# Altium PCB MainPCB.PcbDoc
Units mil, origin at the board's own origin, x right, y up, seen from the top; angles counter-clockwise.
Board outline 4245 x 2995 mil, 2 copper layers (Top Layer, Bottom Layer); 53 components, 34 nets, 146 pads, 53 vias.
Unrouted connection lines stored in the file: 2.
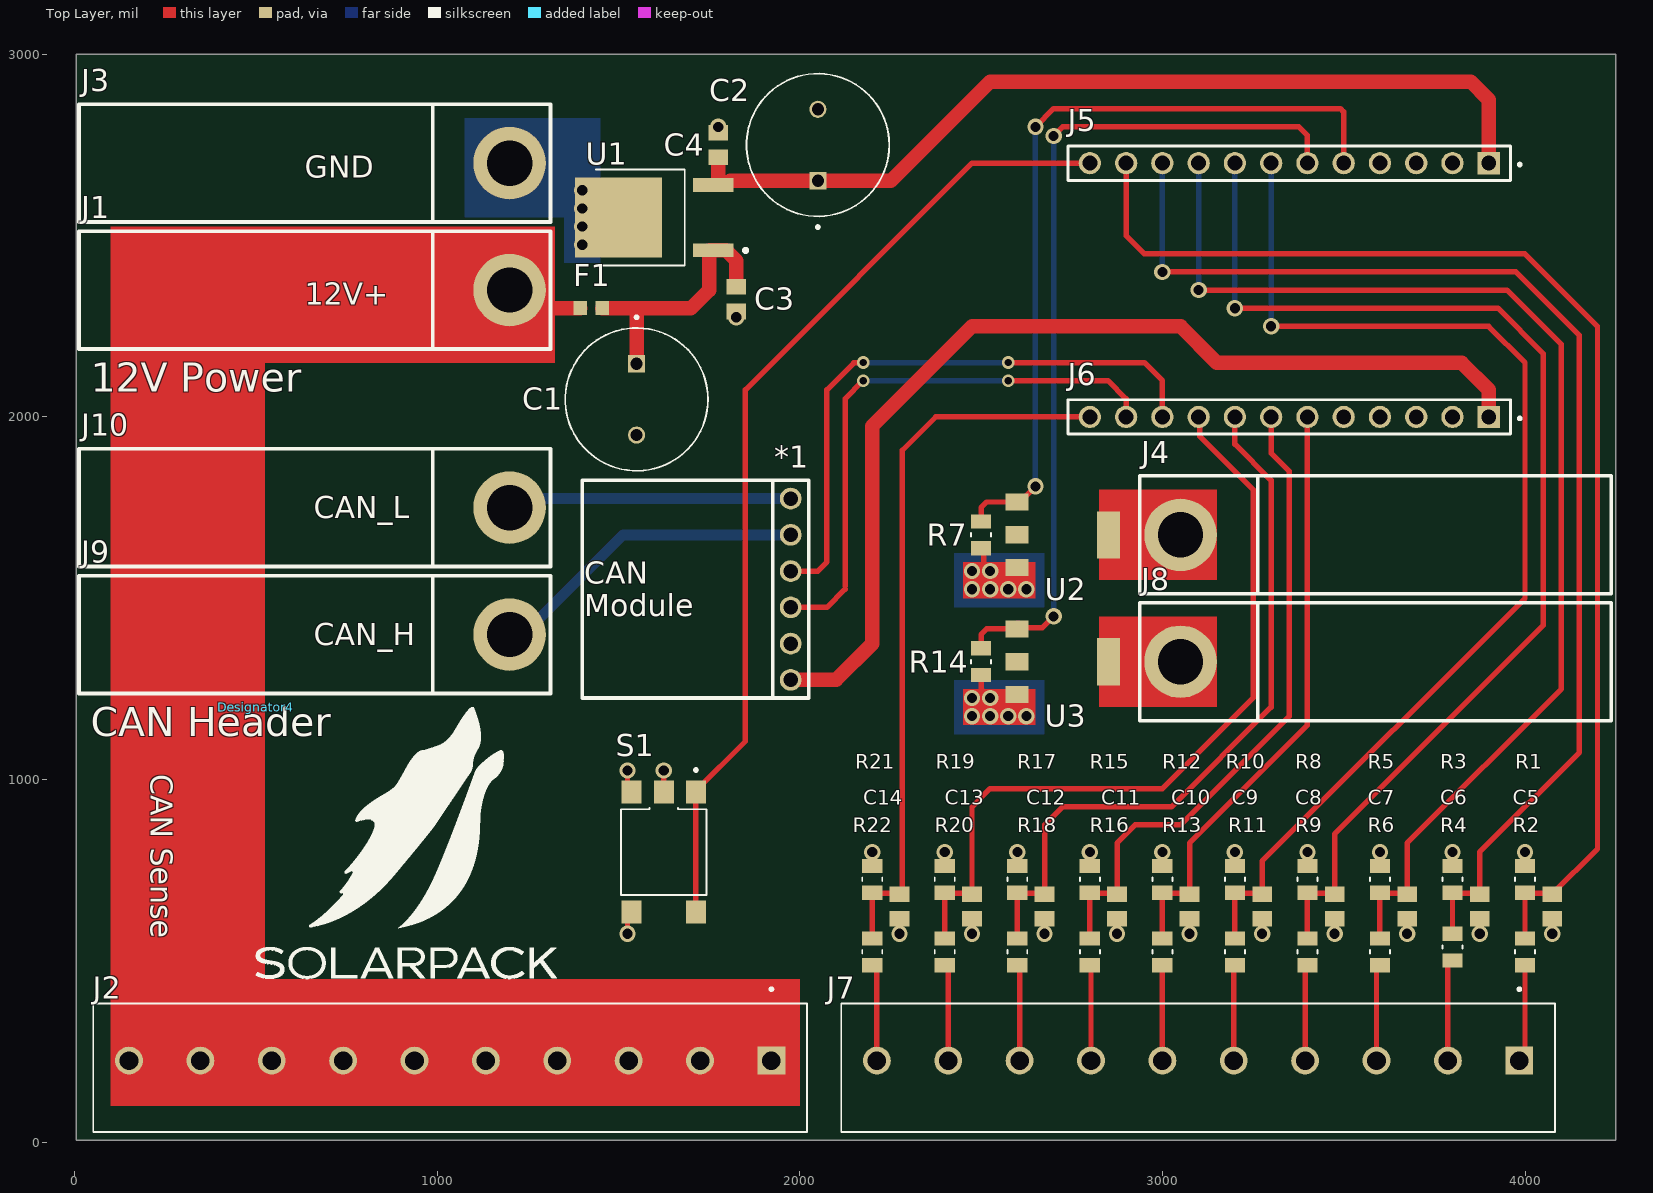
[diagram p0: Top Layer view]
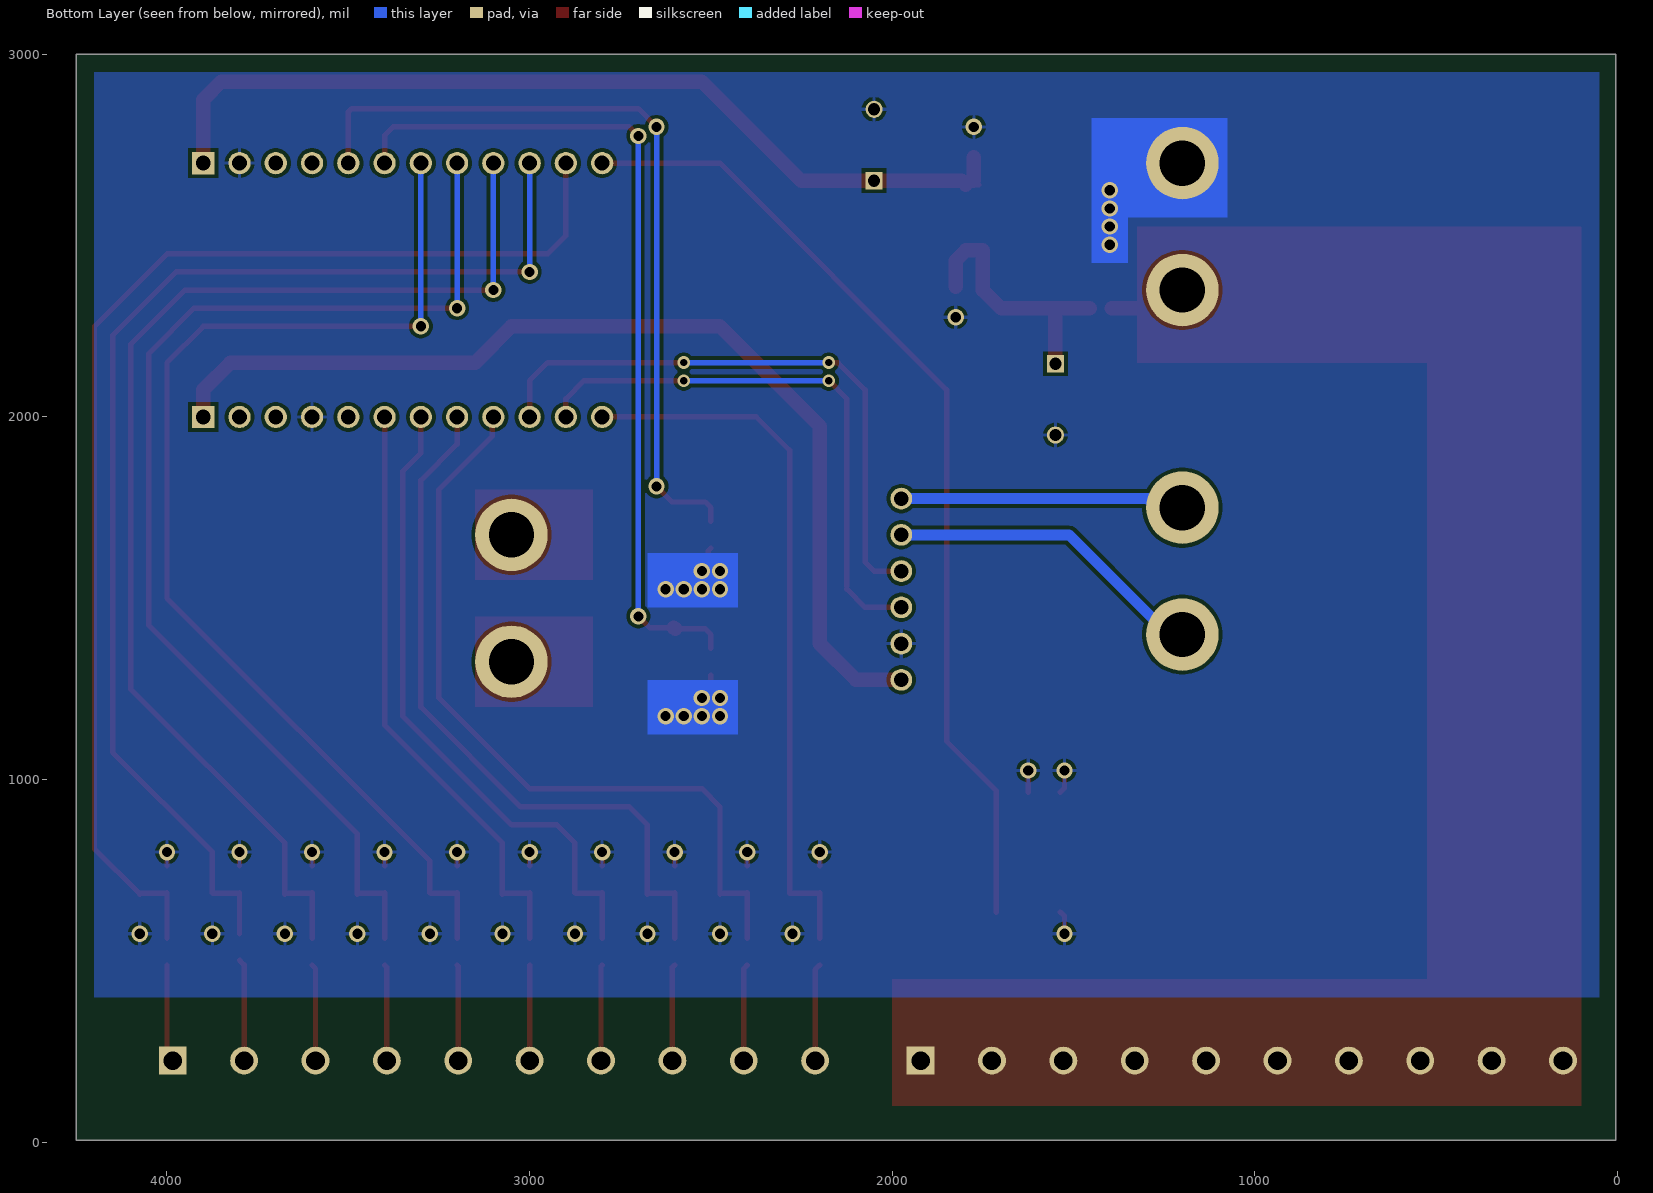
[diagram p1: Bottom Layer view, seen from below]
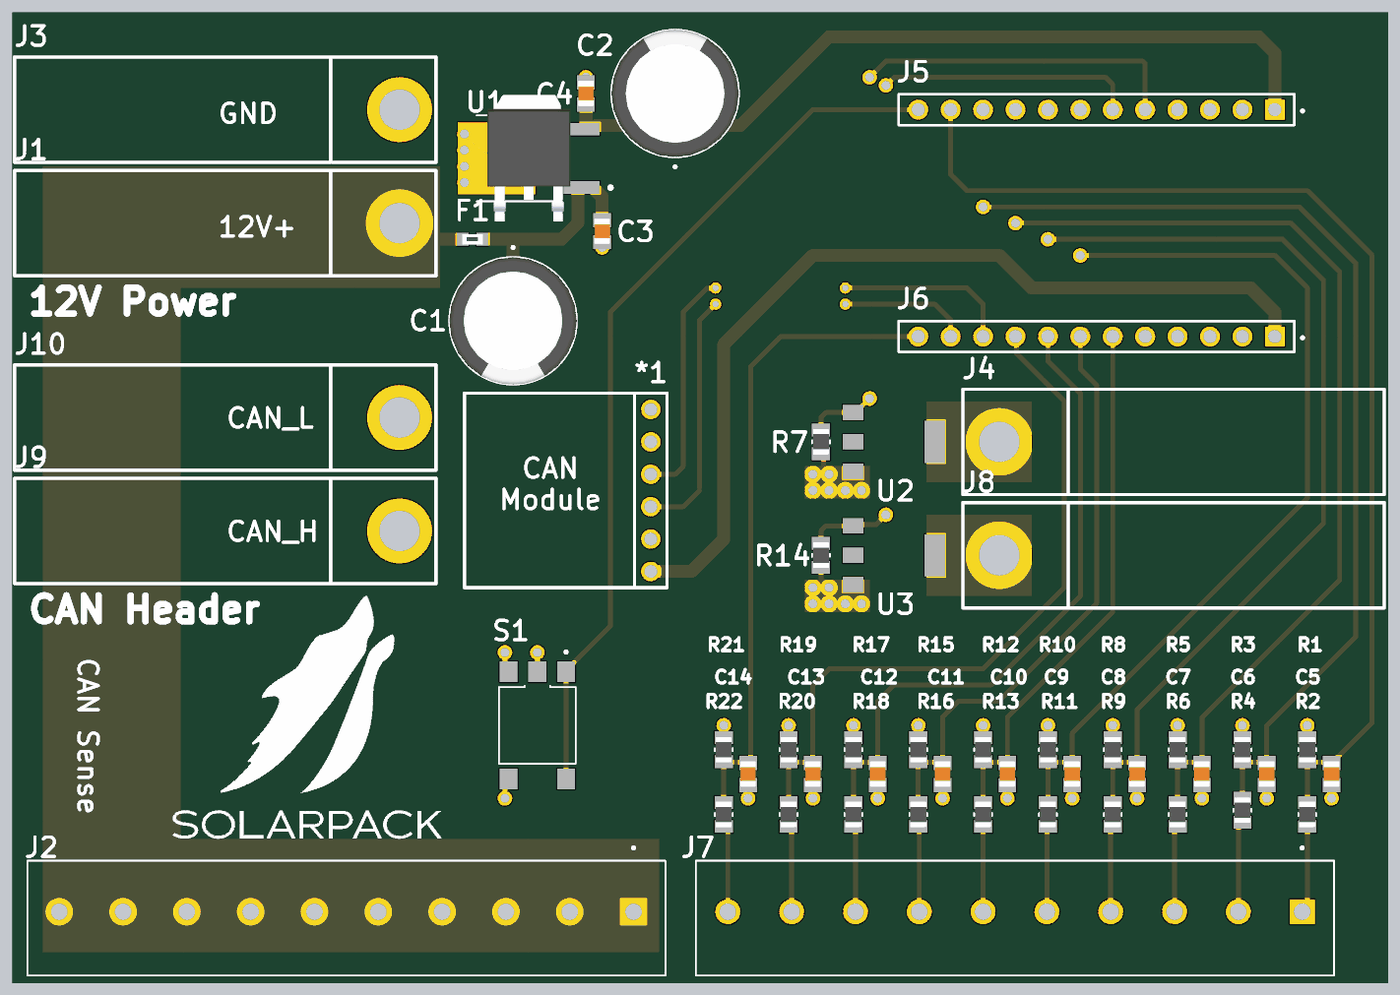
[diagram p2: 3D render of the assembled board from above, using the file's embedded part models]

## Layer stack, top to bottom
Top Solder: solder mask 0.4, Solder Resist, Dk 3.5
Top Layer: signal copper 1.4
Dielectric 1: dielectric 12.6, FR-4, Dk 4.8
Bottom Layer: signal copper 1.4
Bottom Solder: solder mask 0.4, Solder Resist, Dk 3.5

## Board outline
410,5 5,5 5,3000 4250,3000 4250,5

## Design rules (kind name [scope] priority, off if disabled: settings)
Clearance [All] p1: gap=10 ignorepadtopadclearanceinfootprint=FALSE except(0: Arc-Hole Track-Hole SMDPad-Hole THPad-Hole Via-Hole Fill-Hole Poly-Hole Region-Hole Text-Hole)
PolygonConnect [All] p1: connectstyle=Relief reliefconductorwidth=10 reliefentries=4 polygonreliefangle="90 Angle" airgapwidth=10
RoutingVias [All] p1: holewidth=28 width=30 viastyle="Through Hole" minholewidth=28 minwidth=30 maxholewidth=700 maxwidth=1000
SolderMaskExpansion [All] p1: expansion=4 istentingtop=FALSE
Width [All] p1: maxlimit=100 minlimit=10 preferedwidth=30
30 further rules are at their usual default settings.

## Components (designator, comment, footprint, x,y, rotation, side; value= is the part's Value field where it differs from the comment)
*1 "6POS_HDR" 6POS_HDR 1975,1525 r90 top
C1 "ECA1HM331B" CAPPRD500W60D1000H1600 1550,2048.43 r270 top
C2 "ECA1HM331B" CAPPRD500W60D1000H1600 2050,2750 r90 top
C3 "1uF 16V" CAPC2012X135N 1825,2325 r270 top
C4 "1uF 16V" CAPC2012X135N 1775,2750 r90 top
C5 "1uF 16V" CAPC2012X135N 4075,650 r270 top
C6 "1uF 16V" CAPC2012X135N 3875,650 r270 top
C7 "1uF 16V" CAPC2012X135N 3675,650 r270 top
C8 "1uF 16V" CAPC2012X135N 3475,650 r270 top
C9 "1uF 16V" CAPC2012X135N 3275,650 r270 top
C10 "1uF 16V" CAPC2012X135N 3075,650 r270 top
C11 "1uF 16V" CAPC2012X135N 2875,650 r270 top
C12 "1uF 16V" CAPC2012X135N 2675,650 r270 top
C13 "1uF 16V" CAPC2012X135N 2475,650 r270 top
C14 "1uF 16V" CAPC2012X135N 2275,650 r270 top
Designator4 "Comment" "Solarpack Logo" 500,1200 r0 top
F1 "C2Q-2" FUSC1608X56N 1425,2300 r0 top
J1 "AndersonEdgeMount" AndersonEdgeMount 700,2350 r0 top
J2 "TB001-500-10BE" CUI_TB001-500-10BE 1921.85,225 r180 top
J3 "AndersonEdgeMount" AndersonEdgeMount 700,2700 r0 top
J4 "AndersonEdgeMount" AndersonEdgeMount 3550,1675 r180 top
J5 "SSW-112-01-X-S" SAMTEC_SSW-112-01-X-S 3350,2700 r180 top
J6 "SSW-112-01-X-S" SAMTEC_SSW-112-01-X-S 3350,2000 r180 top
J7 "TB001-500-10BE" CUI_TB001-500-10BE 3984.25,225 r180 top
J8 "AndersonEdgeMount" AndersonEdgeMount 3550,1325 r180 top
J9 "AndersonEdgeMount" AndersonEdgeMount 700,1400 r0 top
J10 "AndersonEdgeMount" AndersonEdgeMount 700,1750 r0 top
R1 "CRG0805F13K" RESC2012X65N 4000,725 r90 top
R2 "CRG0805F30K" RESC2012X65N 4000,525 r270 top
R3 "CRG0805F13K" RESC2012X65N 3800,725 r90 top
R4 "CRG0805F30K" RESC2012X65N 3800,538.19 r270 top
R5 "CRG0805F13K" RESC2012X65N 3600,725 r90 top
R6 "CRG0805F30K" RESC2012X65N 3600,525 r270 top
R7 "CRG0805F13K" RESC2012X65N 2500,1675 r90 top
R8 "CRG0805F13K" RESC2012X65N 3400,725 r90 top
R9 "CRG0805F30K" RESC2012X65N 3400,525 r270 top
R10 "CRG0805F13K" RESC2012X65N 3200,725 r90 top
R11 "CRG0805F30K" RESC2012X65N 3200,525 r270 top
R12 "CRG0805F13K" RESC2012X65N 3000,725 r90 top
R13 "CRG0805F30K" RESC2012X65N 3000,525 r270 top
R14 "CRG0805F13K" RESC2012X65N 2500,1325 r90 top
R15 "CRG0805F13K" RESC2012X65N 2800,725 r90 top
R16 "CRG0805F30K" RESC2012X65N 2800,525 r270 top
R17 "CRG0805F13K" RESC2012X65N 2600,725 r90 top
R18 "CRG0805F30K" RESC2012X65N 2600,525 r270 top
R19 "CRG0805F13K" RESC2012X65N 2400,725 r90 top
R20 "CRG0805F30K" RESC2012X65N 2400,525 r270 top
R21 "CRG0805F13K" RESC2012X65N 2200,725 r90 top
R22 "CRG0805F30K" RESC2012X65N 2200,525 r270 top
S1 "TS06-667-43-BK-260-G-SMT-TR" SW_TS06-667-43-BK-260-G-SMT-TR 1625,800 r270 top
U1 "NCV7805BDTRKG" DPAK229P990X238-4N 1598.82,2550 r90 top
U2 "MOSFET N-CH" ZXMN6A09GTA 2725,1675 r270 top
U3 "MOSFET N-CH" ZXMN6A09GTA 2725,1325 r270 top

## Footprints (in the part's own frame and the unit in brackets; to place one, negate y for a bottom-side part, rotate by r counter-clockwise, add the part's x,y. Pads: shape width x height; smd on the part's side, far side on the other; paste and mask are expansions set on the pad)
6POS_HDR [mil] "6 Position 0.1 Pitch Header"
  round 60 hole 40: 1(-250,0) 2(-150,0) 3(-50,0) 4(50,0) 5(150,0) 6(250,0)
  silkscreen extent -300,-50 300,50
AndersonEdgeMount [mil] "An edge mounted anderson connector!"
  round 200 hole 125: 1(500,0)
  silkscreen extent -688,-162 612,162
CAPC2012X135N [mm]
  rect 1.1x1.38 smd: 1(-0.863,0) 2(0.863,0)
  body extent -1,-0.63 1,0.63, height 1.35
CAPPRD500W60D1000H1600 [mm]
  round 1.2 hole 0.85: N(2.5,0)
  rect 1.2x1.2 hole 0.85: P(-2.5,0)
  silkscreen extent -5.85,-5 5,5, body extent -5,-5 5,5, height 16
CUI_TB001-500-10BE [mm]
  rect 1.95x1.95 hole 1.3: 1(0,0)
  round 1.95 hole 1.3: 2(5,0) 3(10,0) 4(15,0) 5(20,0) 6(25,0) 7(30,0) 8(35,0) 9(40,0) 10(45,0)
  silkscreen extent -2.5,-5.1 47.5,5
DPAK229P990X238-4N [mm]
  rect 0.97x2.83 smd: 1(-2.29,-4.14) 3(2.29,-4.14)
  rect 5.63x6.09 smd paste-2.39: 2(0,2.51)
  silkscreen extent -3.37,-6.5 3.37,4.09, body extent -4.95,-3.25 4.95,3.25, height 2.39
FUSC1608X56N [mm]
  rect 0.93x0.99 smd: 1(-0.77,0) 2(0.77,0)
  body extent -0.8,-0.41 0.8,0.41, height 0.56
RESC2012X65N [mm]
  rect 1x1.42 smd: 1(-0.935,0) 2(0.935,0)
  silkscreen extent -0.12,-0.7 0.12,0.7, body extent -1,-0.63 1,0.63, height 0.65
SAMTEC_SSW-112-01-X-S [mm]
  rect 1.56x1.56 hole 1.04: 01(-13.97,0)
  round 1.56 hole 1.04: 02(-11.43,0) 03(-8.89,0) 04(-6.35,0) 05(-3.81,0) 06(-1.27,0) 07(1.27,0) 08(3.81,0) 09(6.35,0) 10(8.89,0) 11(11.43,0) 12(13.97,0)
  silkscreen extent -16.24,-1.2 15.5,1.2
"Solarpack Logo" [mil]
  silkscreen extent 0,-750 830,0
SW_TS06-667-43-BK-260-G-SMT-TR [mm]
  rect 1.6x1.4 smd: 1(-4.2,2.25) 2(-4.2,-2.25) 3(4.2,2.25) 4(4.2,-2.25) 5(-4.2,0)
  silkscreen extent -5.85,-3 3,3
ZXMN6A09GTA [mm] "N-Channel MOSFET 60V 5.4A"
  rect 1.2x1.6 smd: 1(-2.3,-3.2) 2(0,-3.2) 3(2.3,-3.2)
  rect 3.3x1.6 smd: 2(0,3.2)

## Part data
C1 C2: "M-A", Package=None, Availability=Unavailable, MF="{'manufacturer': u'Panasonic Electronic'}", MP=ECA1HM331B, Price=None
C3 C4 C5 C6 C7 C8 C9 C10 C11 C12 C13 C14: library part CL21B105KOFNNNE, "Cap Ceramic 1uF 16V X7R 10% Pad SMD 0805 125C T/R", Package=None, Availability=Unavailable, MF="{'manufacturer': u'Samsung Electro-Mechanics'}", MP=CL21B105KOFNNNE, Price=None
F1 J2 J7 S1 U1: Package=None, Availability=Unavailable, Price=None
  F1: MF="{'manufacturer': u'Bel Fuse'}", MP=C2Q-2
  J2 J7: MF="{'manufacturer': u'CUI Devices'}", MP=TB001-500-10BE
  S1: MF="{'manufacturer': u'CUI Devices'}", MP=TS06-667-43-BK-260-G-SMT-TR
  U1: MF="{'manufacturer': u'ON Semiconductor'}", MP=NCV7805BDTRKG
J1 J3 J4 J8 J9 J10: "Edge Mounted Anderson Connector"
J5 J6: "CONN RCPT 12POS 0.1 GOLD PCB", Package=None, Availability=Unavailable, MF="{'manufacturer': u'Samtec'}", MP=SSW-112-01-X-S, Price=None
R1 R3 R5 R7 R8 R10 R12 R14 R15 R17 R19 R21: "CRG0805 1% 13K", Package=None, Availability=Unavailable, MF="{'manufacturer': u'TE Connectivity'}", MP=CRG0805F13K, Price=None
R2 R4 R6 R9 R11 R13 R16 R18 R20 R22: "CRG0805 1% 30K", Package=None, Availability=Unavailable, MF="{'manufacturer': u'TE Connectivity'}", MP=CRG0805F30K, Price=None
U2 U3: library part ZXMN6A09GTA

## Via types
v1: diameter 45, hole 28, Top Layer to Bottom Layer, 49 vias
v2: diameter 35, hole 20, Top Layer to Bottom Layer, 4 vias

## Nets (pads, with @x,y where several pads share a name; then routed paths per layer and width w, separated by ;. In a path a pad name is that pad's centre, name@x,y a point inside that pad or via, vN(x,y) a via of type N, cw(c..) or ccw(c..) an arc to the next point about the centre after c; other vN are vias at no path point)
3V3: *1.1 J6.01 | length 2827.8
  Top Layer w40: *1.1 2100,1275 2200,1375 2200,1975 2475,2250 3050,2250 3150,2150 3825,2150 3900,2075 J6.01
5V0: C2.P C4.1 J5.01 U1.3 | length 2498.1
  Top Layer w15: U1.3 1763.41,2640.16 U1.3@1775,2651.75
  Top Layer w40: U1.3@1775,2651.75 C4.1 ; U1.3@1797.52,2641.06 1808.03,2651.57 2251.57,2651.57 2525,2925 3850,2925 3900,2875 J5.01
12V0: C1.P C3.1 F1.2 U1.1 | length 737.1
  Top Layer w40: F1.2 1550,2300 ; C1.P 1550,2300 ; C3.1 1825,2431.46 1796.61,2459.84 U1.1 1750.91,2459.84 1750,2458.94 1750,2350 1700,2300 1550,2300
12V0_UF: F1.1 J1.1 J2.1 J2.2 J2.3 J2.4 J2.5 J2.6 J2.7 J2.8 J2.9 J2.10 | length 438.9
  Top Layer w15: J1.1@1197.5,2350 J1.1@1200,2347.5 ; J1.1@1202.5,2352.5 J1.1 ; 1267.7,2207.3 1267.7,2244.46 1200,2312.16 J1.1@1200,2347.5 ; 1300,2300 1250,2350 J1.1 ; J1.1@1200,2347.5 J1.1
  Top Layer w40: 1267.7,2207.3 1300,2175 ; 1300,2300 F1.1
CAN_H: *1.5 J9.1 | length 888.9
  Bottom Layer w30: J9.1 1237.5,1400 1512.5,1675 *1.5
CAN_L: *1.6 J10.1 | length 818.6
  Top Layer w15: J10.1 J10.1@1233.24,1750
  Bottom Layer w15: J10.1 J10.1@1233.24,1750
  Bottom Layer w30: J10.1@1233.24,1750 1270.74,1750 1295.74,1775 *1.6
CAN_RX: *1.4 J6.10 | length 1662.1
  Top Layer w15: *1.4 2050,1575 2075,1600 2075,2075 2149.22,2149.22 2174.22,2149.22 v2(2175,2150) ; v2(2575,2150) 2950,2150 3000,2100 J6.10
  Bottom Layer w15: v2(2175,2150) v2(2575,2150)
CAN_TX: *1.3 J6.11 | length 1552.3
  Top Layer w15: *1.3 2075,1475 2125,1525 ; 2125,1534.81 2125,2050 v2(2175,2100) ; v2(2575,2100) 2850,2100 2900,2050 J6.11
  Bottom Layer w15: v2(2175,2100) v2(2575,2100)
GND: *1.2 C1.N C2.N C3.2 C4.2 C5.2 C6.2 C7.2 C8.2 C9.2 C10.2 C11.2 C12.2 C13.2 C14.2 J3.1 J5.02 J6.04 R1.2 R3.2 R5.2 R7.1 R8.2 R10.2 R12.2 R14.1 R15.2 R17.2 R19.2 R21.2 S1.2 S1.4 S1.5 U1.2 U2.3 U3.3 | length 880.2
  Top Layer w15: v1(1525,575) 1525,623.23 S1.4 ; v1(1525,1025) 1525,976.77 S1.2 ; S1.5 v1(1625,1025) ; R21.2 v1(2200,800) ; R19.2 v1(2400,800) ; R14.1 2500,1250 2515.55,1234.45 U3.3 ; R7.1 2507.5,1630.69 2507.5,1592.5 2534.6,1565.4 2572.1,1565.4 2572.1,1552.9 2575,1550 v1(2575,1525) ; R17.2 v1(2600,800) ; R15.2 v1(2800,800) ; R12.2 v1(3000,800) ; R10.2 v1(3200,800) ; R8.2 v1(3400,800) ; R5.2 v1(3600,800) ; R3.2 v1(3800,800) ; R1.2 v1(4000,800)
  other v1: 2275,575 2475,575 2675,575 2875,575 3075,575 3275,575 3475,575 3675,575 3875,575 4075,575 2475,1175 2525,1175 2575,1175 2625,1175 2475,1225 2525,1225 2475,1525 2525,1525 2625,1525 2475,1575 2525,1575 1825,2275 1400,2475 1400,2525 1400,2575 1400,2625 1775,2800
NetC10_1: C10.1 J6.06 R12.1 R13.1 | length 1653.8
  Top Layer w15: R13.1 R12.1 3002.11,686.08 3072.89,686.08 C10.1 3075,825 3400,1150 J6.06
NetC11_1: C11.1 J6.07 R15.1 R16.1 | length 1805.6
  Top Layer w15: R16.1 R15.1 2802.11,686.08 2872.89,686.08 2875,688.19 2875,825 2925,875 3050,875 3350,1175 3350,1850 3300,1900 J6.07
NetC12_1: C12.1 J6.08 R17.1 R18.1 | length 1995.2
  Top Layer w15: R18.1 R17.1 2602.11,686.08 2672.89,686.08 C12.1 2675,875 2725,925 3025,925 3300,1200 3300,1825 3200,1925 J6.08
NetC13_1: C13.1 J6.09 R19.1 R20.1 | length 2180.5
  Top Layer w15: R20.1 R19.1 2402.11,686.08 2472.89,686.08 C13.1 2475,925 2525,975 3000,975 3250,1225 3250,1800 3103.21,1946.79 3103.21,1996.79 J6.09
NetC14_1: C14.1 J6.12 R21.1 R22.1 | length 1984.9
  Top Layer w15: R22.1 R21.1@2200,686.08 ; R21.1 2202.11,686.08 2282.62,686.08 2282.62,1907.62 2375,2000 J6.12
NetJ4_1: J4.1 U2.2
NetJ5_05: J5.05 R7.2 U2.1 | length 2219.4
  Top Layer w15: R7.2 2500,1750 2515.55,1765.55 U2.1 2606.89,1765.55 v1(2650,1808.66) ; v1(2650,2800) 2700,2850 3491.21,2850 3500,2841.21 J5.05
  Bottom Layer w15: v1(2650,1808.66) v1(2650,2800)
NetJ5_06: J5.06 R14.2 U3.1 | length 2380.5
  Top Layer w15: R14.2 2500,1400 2515.55,1415.55 U3.1 ; U3.1@2602.64,1419.17 2669.17,1419.17 v1(2700,1450) ; v1(2700,2775) 2725,2800 3376.57,2800 3400,2776.57 J5.06
  Top Layer w40: U3.1 U3.1@2602.64,1419.17
  Bottom Layer w15: v1(2700,1450) v1(2700,2775)
NetJ5_12: J5.12 S1.1 S1.3 | length 2705.7
  Top Layer w15: S1.3 S1.1 1713.58,969.29 1850,1105.71 1850,2075 2475,2700 J5.12
NetJ7_2: J7.2 R4.2 | length 281.8
  Top Layer w15: J7.2 3787.4,489.19 3799.59,501.38 R4.2
NetJ7_3: J7.3 R6.2 | length 267.1
  Top Layer w15: J7.3 3590.55,478.74 R6.2
NetJ7_4: J7.4 R9.2 | length 265.8
  Top Layer w15: J7.4 3393.7,481.89 R9.2
NetJ7_5: J7.5 R11.2 | length 264.5
  Top Layer w15: J7.5 3196.85,485.04 R11.2
NetJ7_6: J7.6 R13.2 | length 263.2
  Top Layer w15: J7.6 R13.2
NetJ7_7: J7.7 R16.2 | length 264.5
  Top Layer w15: R16.2 2803.15,485.04 J7.7
NetJ7_8: J7.8 R18.2 | length 265.8
  Top Layer w15: R18.2 2606.3,481.89 J7.8
NetJ7_9: J7.9 R20.2 | length 267.1
  Top Layer w15: R20.2 2409.45,478.74 J7.9
NetJ7_10: J7.10 R22.2 | length 268.6
  Top Layer w15: R22.2 2200.41,488.19 2212.6,476 J7.10
NetJ8_1: J8.1 U3.2
SW_1: J7.1 R2.2 | length 269.7
  Top Layer w15: J7.1 4000,240.75 R2.2
SW_1_L: C5.1 J5.11 R1.1 R2.1 | length 3424.5
  Top Layer w15: J5.11 2900,2500 2950,2450 4000,2450 4200,2250 4200,808.98 C5.1 4072.89,686.08 4002.11,686.08 R1.1 R2.1
SW_2_L: C6.1 J5.10 R3.1 R4.1 | length 3363.1
  Top Layer w15: v1(3000,2400) 3975,2400 4150,2225 4150,1075 3875,800 3875,688.19 3872.89,686.08 3802.11,686.08 R3.1 R4.1
  Bottom Layer w15: v1(3000,2400) J5.10
SW_3_L: C7.1 J5.09 R5.1 R6.1 | length 3307.3
  Top Layer w15: v1(3100,2350) 3950,2350 4100,2200 4100,1250 3675,825 C7.1 3672.89,686.08 3602.11,686.08 R5.1 R6.1
  Bottom Layer w15: v1(3100,2350) J5.09
SW_4_L: C8.1 J5.08 R8.1 R9.1 | length 3234.1
  Top Layer w15: v1(3200,2300) 3925,2300 4050,2175 4050,1425 3475,850 C8.1 3472.89,686.08 3402.11,686.08 R8.1 R9.1
  Bottom Layer w15: v1(3200,2300) J5.08
SW_5_L: C9.1 J5.07 R10.1 R11.1 | length 3156.7
  Top Layer w15: R11.1 R10.1 3202.11,686.08 3272.89,686.08 3275,688.19 3275,775 4000,1500 4000,2150 3900,2250 v1(3300,2250)
  Bottom Layer w15: v1(3300,2250) J5.07
pads on no net: J5.03 J5.04 J6.02 J6.03 J6.05

## Polygon pours and split planes (outlines as drawn)
GND on Bottom Layer "NONET_L-01_P-001" (solid, pour order 0): 4200,2950 4200,400 50,400 50,2950

## Other copper
Top Layer:
  rectangle net GND: 2450,1150 2650,1250
  rectangle net GND: 2450,1500 2650,1600
  rectangle net NetJ8_1: 2825,1200 3150,1450
  rectangle net NetJ4_1: 2825,1550 3150,1800
  region net 12V0_UF: 100,100 2000,100 2000,450 525,450 525,2150 1325,2150 1325,2525 100,2525
Bottom Layer:
  rectangle net GND: 2425,1475 2675,1625
  rectangle net GND: 2425,1125 2675,1275
  rectangle net GND: 1350,2425 1450,2700
  rectangle net GND: 1075,2550 1450,2825

## Silkscreen, mask and mechanical layers (free items; w line width, h text height)
Top Overlay:
  lines w10: 1400,1225 2025,1225 2025,1825 1400,1825 1400,1225
  text "GND" at 635,2660 h60
  text "12V+" at 635,2310 h60
  text "12V Power" at 45,2070 h80
  text "CAN_L" at 660,1720 h60
  text "CAN / Module" at 1405.09,1450 h60
  text "CAN_H" at 660,1370 h60
  text "CAN Header" at 45,1120 h80
  text "CAN Sense" at 210,1015 h60 r270
Mechanical 1:
  lines w10: 0,0 4250,0 4250,3000 0,3000 0,0